# Altium PCB SV601275A.PcbDoc (part 2 of 3)
Units mil, origin at the board's own origin, x right, y up, seen from the top; angles counter-clockwise.
Board outline 1980 x 1700 mil, 6 copper layers (Top Layer, MidLayer1, MidLayer2, Mid-Layer 3, Mid-Layer 4, Bottom Layer), stack 61.3 mil thick; 82 components, 37 nets, 191 pads, 177 vias.
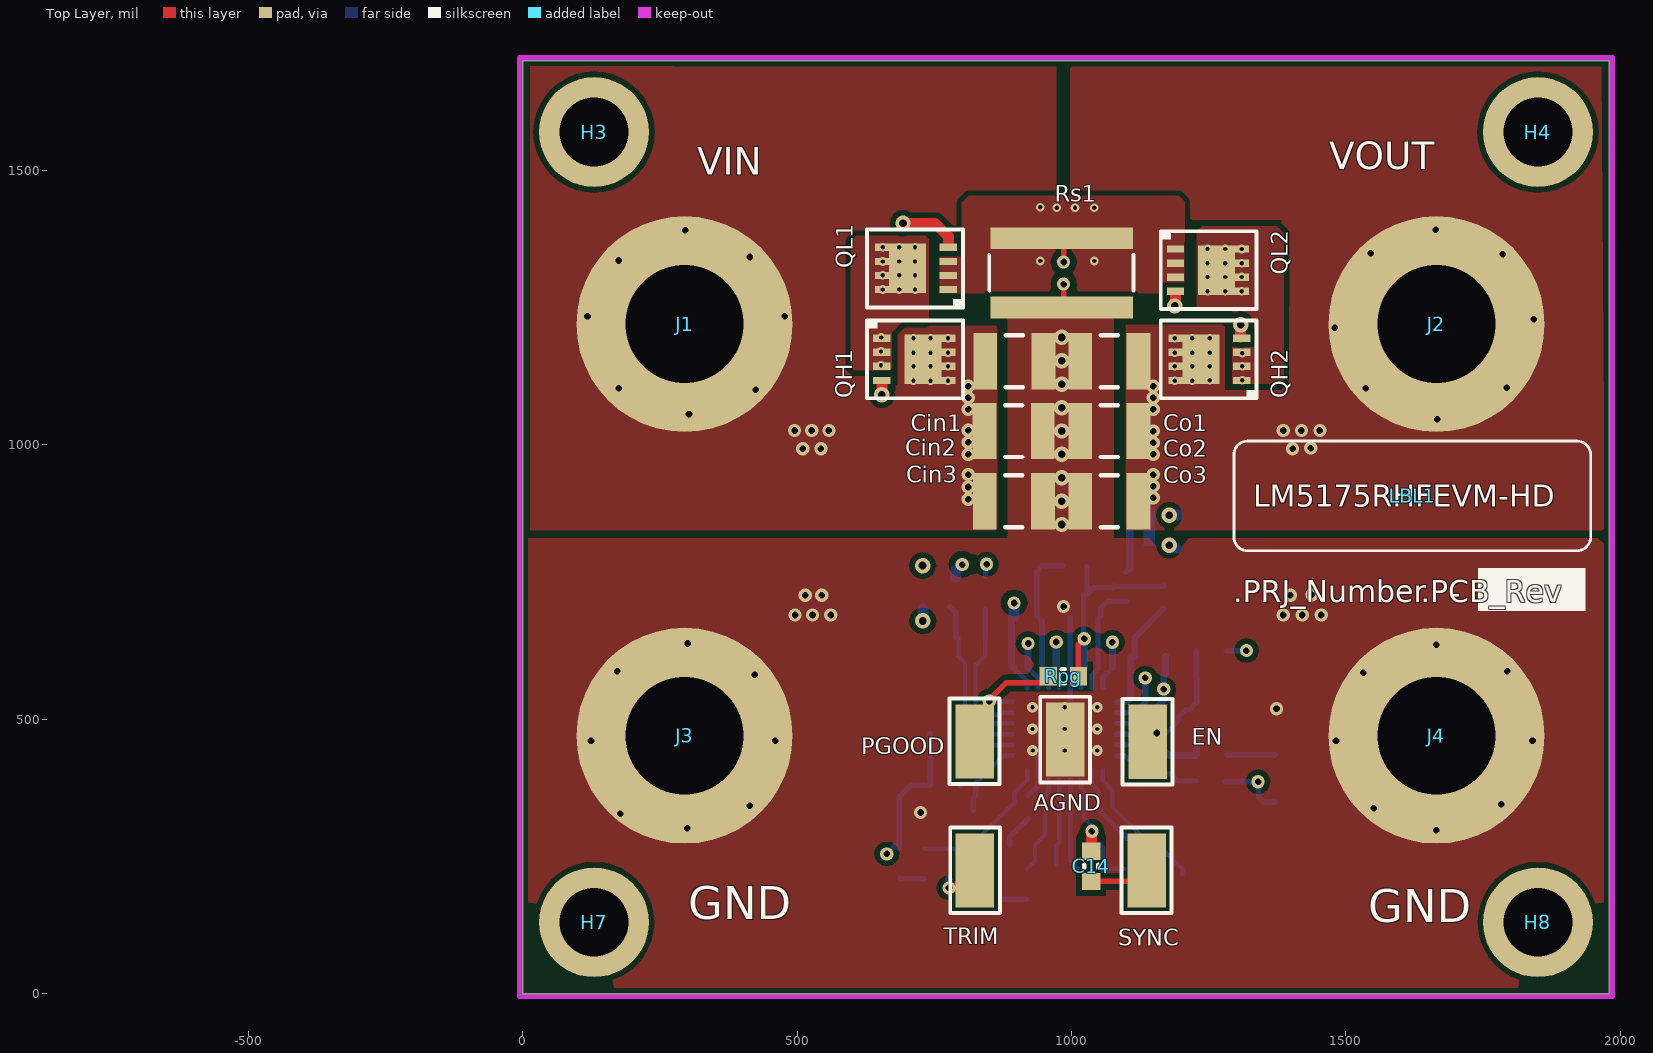
[diagram p0: Top Layer view]

## Via types
v1: diameter 24, hole 12, Top Layer to Bottom Layer, tented both sides, 91 vias
v2: diameter 15.75, hole 7.87, Top Layer to Bottom Layer, tented both sides, 60 vias
v3: diameter 28, hole 14, Top Layer to Bottom Layer, tented both sides, 17 vias
v4: diameter 19.68, hole 7.87, Top Layer to Bottom Layer, 8 vias
v5: diameter 19.69, hole 7.87, Top Layer to Bottom Layer, 1 vias

## Nets (pads, with @x,y where several pads share a name; then routed paths per layer and width w, separated by ;. In a path a pad name is that pad's centre, name@x,y a point inside that pad or via, vN(x,y) a via of type N, cw(c..) or ccw(c..) an arc to the next point about the centre after c; other vN are vias at no path point) (continued)
EN: C1.2 EN.1 R1.1 R2.2 U1.26 | length 266.4
  Bottom Layer w8: v1(1155,475) 1173,475 1195.31,497.31
  Bottom Layer w9.4: U1.26@1082.49,472.52 1144.38,472.52 v1@1151.86,480 ; 1195.16,497.7 1195.16,504.59 1208.57,518 1215.44,518 C1.2@1227.44,530 ; R1.1@1227.44,625 1227.44,575.52 1228.25,574.72 C1.2@1228.25,530.62
FB: R10.1 R12.2 R15.2 U1.8 | length 269
  Bottom Layer w8: R12.2@731.96,264.31 R12.2@732.29,264.31 R15.2@778,264.31 R10.1@818.48,264.31 ; R10.1@825.96,264.31 837,275.35 837,290.41 852.28,305.7 852.65,305.7 870.65,323.7 871.4,323.7 883.22,335.51 883.22,335.79 895.39,347.96 895.39,365 919.1,388.71 U1.8@919.1,407.56
GND: AGND.1 C1.1 C4.1 C5.2 C11.2 Cbias.2 Cc1.2 Cc2.1 Cin1.2 Cin2.2 Cin3.2 Cin4.2 Cin5.2 Cin6.2 Cin7.2 Cin8.2 Co1.2 Co2.2 Co3.2 Co4.2 Co5.2 Co6.2 Co7.2 Css.2 CT1.1 Cvcc.2 J3.1 J4.1 R2.1 R8.1 R10.2 R14.2 Rcd.1 Rs1.1 RT1.1 U1.7 U1.19 U1.29 | length 961
  Top Layer w10: Rs1.1@985.61,1253.91 v1@985.61,1296.19
  Mid-Layer 3 w10: v1(801,781.75) 823,803.75 823,828.49 908,913.49 908,1212.92 985.61,1290.54 v1@985.61,1296.19
  Bottom Layer w9.4: 921.02,360.63 938.79,378.39 U1.7@938.79,407.56 U1.29@938.79,432.85 ; 997.84,592.66 U1.19@997.84,557.17 997.84,530.16 ccw(c1001,530.16) U1.29@1001,527
  Bottom Layer w10: Cc2.1@887.44,270.75 887.44,285.11 920.98,318.65
  Bottom Layer w10.5: 997.75,594.57 Cbias.2@997.75,684.75
  Bottom Layer w20: R14.2@789,757.97 R14.2@789,760.31 789,769.75 v1(801,781.75)
  other v1: 1665,298 300,301 177.5,328 725,330 1551,338 414,342 1783,345 124.38,461 460,461 1482,461 1840,461 1373.61,519 423,581.07 1532.02,585 172,587.37 1794,587.37 1665,636 301,638 496.29,690 528.1,690 561.17,690 1386,690 1420.5,690 1455,690 985.61,705.46 515,726 545,726 1399,726 1438,727 985.61,1292.84
  other v3: 982.16,854.75 982.16,897.37 982.16,940 982.16,982.62 982.16,1025.25 982.16,1067.87 982.16,1110.5 982.16,1153.12 982.16,1195.75
  other v4: 929.2,443 988,443 1047.06,443 928.94,482.37 988,482.37 1047.06,482.37 928.94,521.74 988,521.74
  other v5: 1047,521.74
HDRV1: Rh1.1 U1.24 | length 573.7
  MidLayer2 w20: v3(729.03,679.15) 832.44,575.75 v1(1134.35,575.37) v1@1134.83,575.37
  Bottom Layer w9.4: U1.24@1082.49,511.89 1115.11,511.89
  Bottom Layer w12: 1115.11,511.89 1134.35,531.12 v1@1134.35,574.72
  Bottom Layer w20: v3(729.03,679.15) Rh1.1@729.03,700.81
HDRV2: QH2.4 U1.16 | length 999.4
  Top Layer w20: QH2.4@1308.06,1196.56 v3@1308.06,1209.38
  MidLayer2 w20: v1@920.98,645.75 920.98,690.9 976.83,746.75 1216.59,746.75 1342.02,872.18 1341.04,1185 ; v3@1309,1218 1341.04,1185.96
  Bottom Layer w9.4: 919.64,594 938.79,574.85 U1.16@938.79,557.17
  Bottom Layer w13: 920.98,594.57 v1@920.98,637
  other v1: 921.02,638
  other v3: 1308.35,1219
LDRV1: QL1.4 U1.22 | length 1180.2
  Top Layer w20: v3(692.96,1403.75) 751,1403.75 775.49,1379.25 QL1.4@775.49,1364
  Mid-Layer 4 w20: v3(692.96,1403.75) 731.55,1403.75 848.16,1287.14 848.16,855.36 938.78,764.75 1003.75,764.75 1074.52,693.97 v1(1074.52,640.31)
  Bottom Layer w9.4: U1.22@1056.9,557.17 1056.9,575.9 1075,594
  Bottom Layer w13: 1074.52,594.57 v1(1074.52,640.31)
LDRV2: Rl1.2 U1.18 | length 402.7
  Mid-Layer 3 w20: v1(972.16,640.75) 1068.16,736.75 1151.16,736.75 1178.16,763.75 v3@1178.16,811.75
  Bottom Layer w9.4: 973,593 978.16,587.84 U1.18@978.16,557.17
  Bottom Layer w13: 972.16,594.57 v1(972.16,640.75)
  Bottom Layer w20: v3@1178.16,811.75 Rl1.2@1191.72,811.75
  other v3: 1178.16,817
MODE: R8.2 U1.1 | length 258.1
  Bottom Layer w8: U1.1@1056.9,407.56 1056.9,387.63 1074.52,370 1074.52,340.29 1137.07,277.75 1151,277.75 1201.81,226.93 R8.2@1201.81,217.65
NetC13_1: C13.1 R14.1 U1.12 | length 293.8
  Bottom Layer w8: C13.1@794.12,648.13 794.12,615 806,603.12 806,517.15 831.12,492.03 871.63,492.03 871.81,492.21 U1.12@893.51,492.21
  Bottom Layer w10: R14.1@778.4,705.19 789,694.59 C13.1@789,649.7
NetC13_2: C13.2 R13.1 U1.13 | length 261
  Bottom Layer w8: C13.2@842.56,648.13 842.56,615.75 825,598.19 825,523 839.97,508.03 865,508.03 868.86,511.89 U1.13@893.51,511.89
  Bottom Layer w10: C13.2@842.56,648.13 842.56,700.02 R13.1@842.81,700.27
NetC14_2: C14.2 SYNC.1 | length 110.9
  Top Layer w10: C14.2@1035.77,204.44 1130.64,204.44 SYNC.1@1141.95,215.75
NetCc1_1: Cc1.1 Rc.1 | length 46
  Bottom Layer w10: Cc1.1@871.96,172.19 Cc1.1@874,172.19 Rc.1@917.96,172.19
NetD1_1: D1.1 R5.2 | length 88.3
  Bottom Layer w10: R5.2@1283,436 1283.69,435.31 D1.1@1371,435.31
NetQH1_4: QH1.4 Rh1.2 | length 366.3
  Top Layer w20: v3@654.43,1091 QH1.4@654.43,1114
  MidLayer2 w20: v3@654,1092 v3(654,1091) 654.43,852.52 v3(728.66,779.99)
NetQl1_1: QL1.1 QL1.2 QL1.3 QL2.1 QL2.2 QL2.3 R13.2 Rs1.2 | length 704.6
  Top Layer w10: Rs1.2@982.03,1376.32 985.61,1372.74 v1(985.61,1333.26)
  Mid-Layer 3 w10: v1(845.26,782.33) 845.26,818.01 930,902.75 930,1198.47 995.36,1263.84 997.63,1263.84 1014.61,1280.83 1014.61,1313.39 994.74,1333.26 v1(985.61,1333.26)
  Bottom Layer w10: R13.2@843.56,760.31 v1@843.56,780.62
  other v2: 942.81,1335 1041.29,1335 973,1432 1006.53,1432 1041.29,1432 942.81,1433
NetQL2_4: QL2.4 Rl1.1 | length 509.7
  Top Layer w20: v3@1189.43,1253.26 QL2.4@1189.43,1275
  Mid-Layer 3 w20: v3@1181,871.75 v3(1178.16,871.75) 1124.25,871.75 1111.28,884.72 1111.28,1176.12 v3(1188.16,1253)
  Bottom Layer w20: Rl1.1@1181,871.75 Rl1.1@1193.72,871.75
NetR9_2: R9.2 U1.10 | length 106.3
  Bottom Layer w8: R9.2@798,426.71 825,426.71 851.13,452.84 U1.10@893.51,452.84
NetR11_2: R11.2 U1.11 | length 93.5
  Bottom Layer w8: R11.2@800,472.52 U1.11@893.51,472.52
NetR12_1: R12.1 R16.2 | length 44.4
  Bottom Layer w10: R16.2@687.96,210.19 688.96,209.19 R12.1@731.96,209.19
NetR15_1: R15.1 TRIM.1 | length 115.3
  Top Layer w15: v1(776.81,192.75) 788,192.75 812.82,217.57 812.82,228.75 824.82,240.75 TRIM.1@824.82,249.75
  Top Layer w20: TRIM.1@813.11,227.9 TRIM.1@824.82,239.61
  Bottom Layer w15: v1(776.81,192.75) R15.1@776.81,208.01
PGOOD: PGOOD.1 Rpg.2 U1.14 | length 257.9
  Top Layer w10: PGOOD.1@824,459.75 824,500.58 848.16,524.75 848.16,533.16 881.75,566.75 946.3,566.75 Rpg.2@957.6,578.05
  Bottom Layer w8: v1@847.06,531.58 U1.14@893.51,531.58
  other v1: 850,533.03
SLOPE: C5.1 U1.4 | length 186.7
  Bottom Layer w8: 997.75,370.16 997.75,242.72 C5.1@1013.16,227.31 ; 997.84,370.09 U1.4@997.84,407.56
SS: Css.1 U1.5 | length 177.6
  Bottom Layer w8: Css.1@972,233.75 972,270 971.94,270 977.84,275.9 977.84,376.03 978.16,376.35 U1.5@978.16,407.56 ; Css.1@972.16,238.16 Css.1@972.96,238.96
SW1: Cb1.2 L1.1 QH1.1 QH1.2 QH1.3 QL1.5 QL1.6 QL1.7 QL1.8 QL1.9 U1.25 | length 1315.6
  MidLayer1 w20: v2@653,1146 v2(653,1170) v2@653,1196
  MidLayer2 w20: v2@653.43,1145 653.21,1144.79 621,1113 621,838.75 853,606.75 1151.31,606.75 1168,590.06 v1(1168,555) ; v2@654,1147 v2@654,1195
  Bottom Layer w9.4: U1.25@1082.49,492.21 1126.14,492.21 1150.93,517
  Bottom Layer w12: 1131,497 1131,497.7 1168.06,534.83 v1@1168.06,554 ; v1@1167.79,554.75 1167.79,580 1171.27,583.48 Cb1.2@1171.27,615
  other v2: 653,1145 653.43,1195.75 656,1283 686,1283 715,1283 656,1309 686,1309 714.96,1309 656,1334 686,1334 714.96,1334 656,1360 686,1360 715,1360
SW2: Cb2.1 L1.2 QH2.1 QH2.2 QH2.3 QL2.5 QL2.6 QL2.7 QL2.8 QL2.9 U1.15 | length 978
  MidLayer1 w20: v2(1311,1118) v2(1311,1143) v2(1311,1167)
  MidLayer2 w20: v1@898.16,711.86 961.05,774.75 1198.82,774.75 1309.96,885.89 ; 1310.49,886.42 1310.92,1118 v2(1311,1143) v2@1311,1164
  Bottom Layer w9.4: 895.39,593 913.03,575.37 913.66,575.37 919.1,569.93 U1.15@919.1,557.17
  Bottom Layer w13: Cb2.1@890.4,688.75 890.4,598.87 894.7,594.57 895.39,594.57
  Bottom Layer w20: Cb2.1@895.39,686.99 v1(895.39,711.86)
  other v2: 1248,1280 1280,1280 1310.49,1280 1248,1306 1280,1306 1310.49,1306 1248,1331 1280,1331 1310.49,1331 1248,1357 1280,1357 1310,1357
SYNC: C14.1 CT1.2 RT1.2 U1.3 | length 260.5
  Top Layer w20: C14.1@1036.59,261.15 v1@1036.59,286.42
  Bottom Layer w8: U1.3@1017.53,407.56 1017.53,375.21 1022.74,370 ; 1023.34,370.16 1023.34,319.74 1036.59,306.49 1036.59,286.42 1057.96,265.05 CT1.2@1057.96,223.31 ; CT1.2@1062.16,227.31 RT1.2@1096.51,227.31
  other v1: 1037.2,295.85